# EAGLE board Veroboard for L293D (EAGLE 7.7.0)
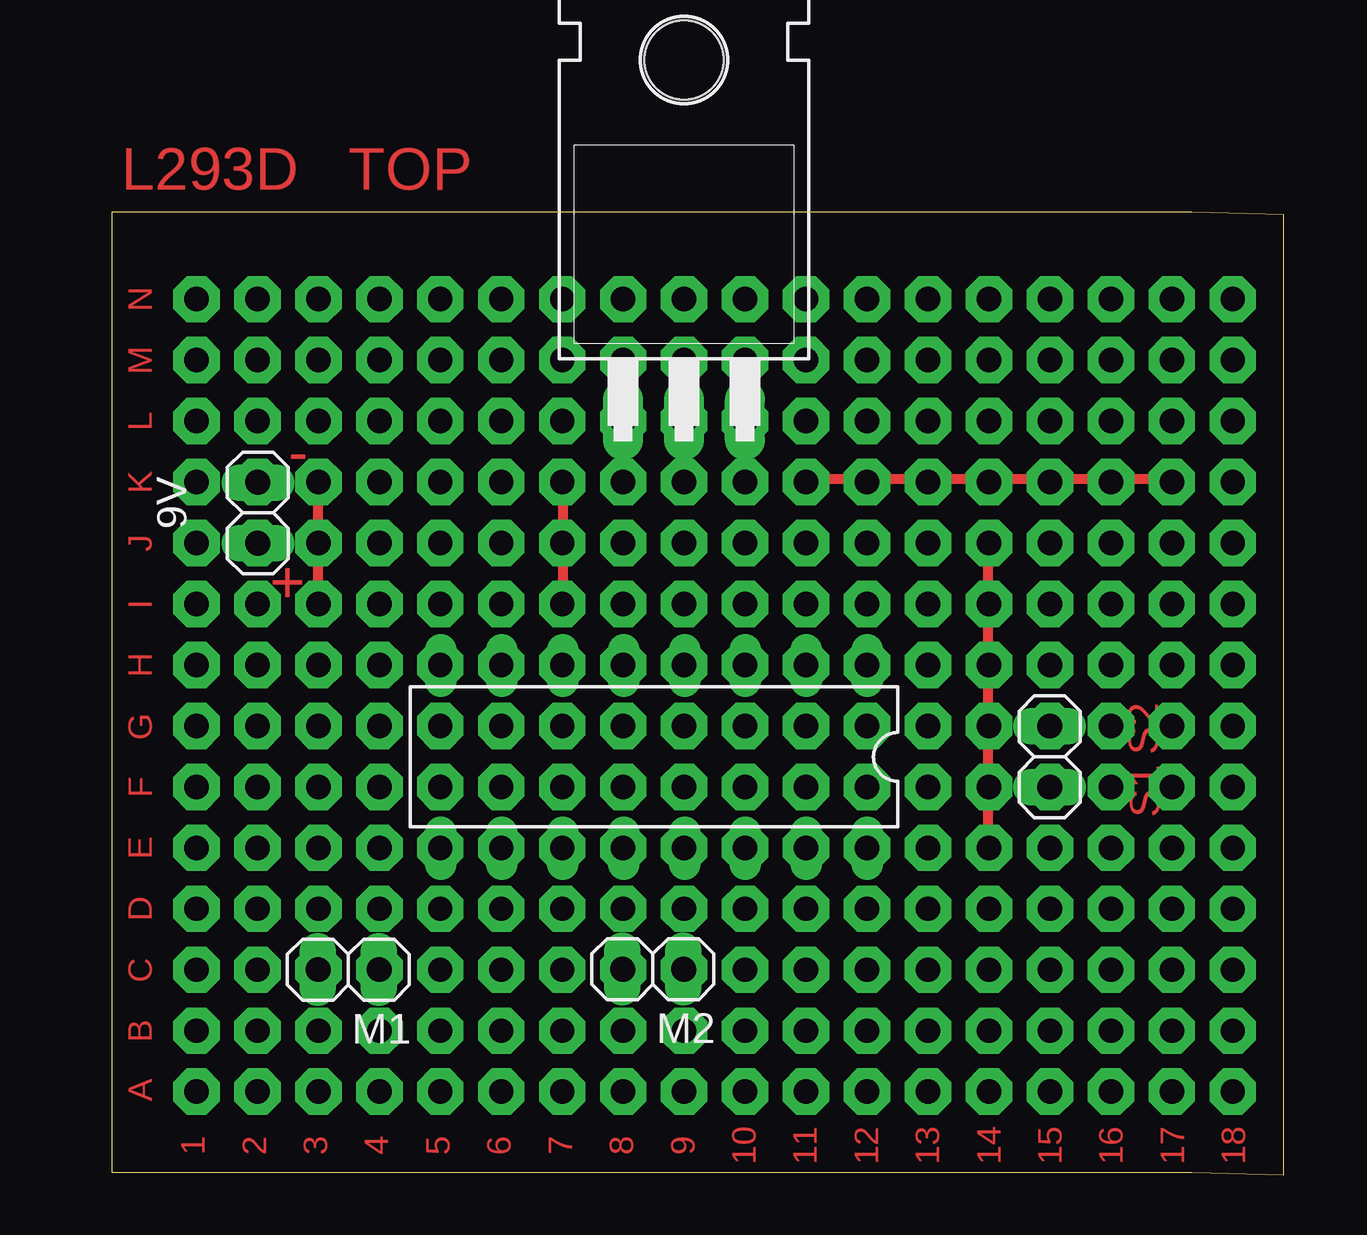
[diagram p0: board, top side]
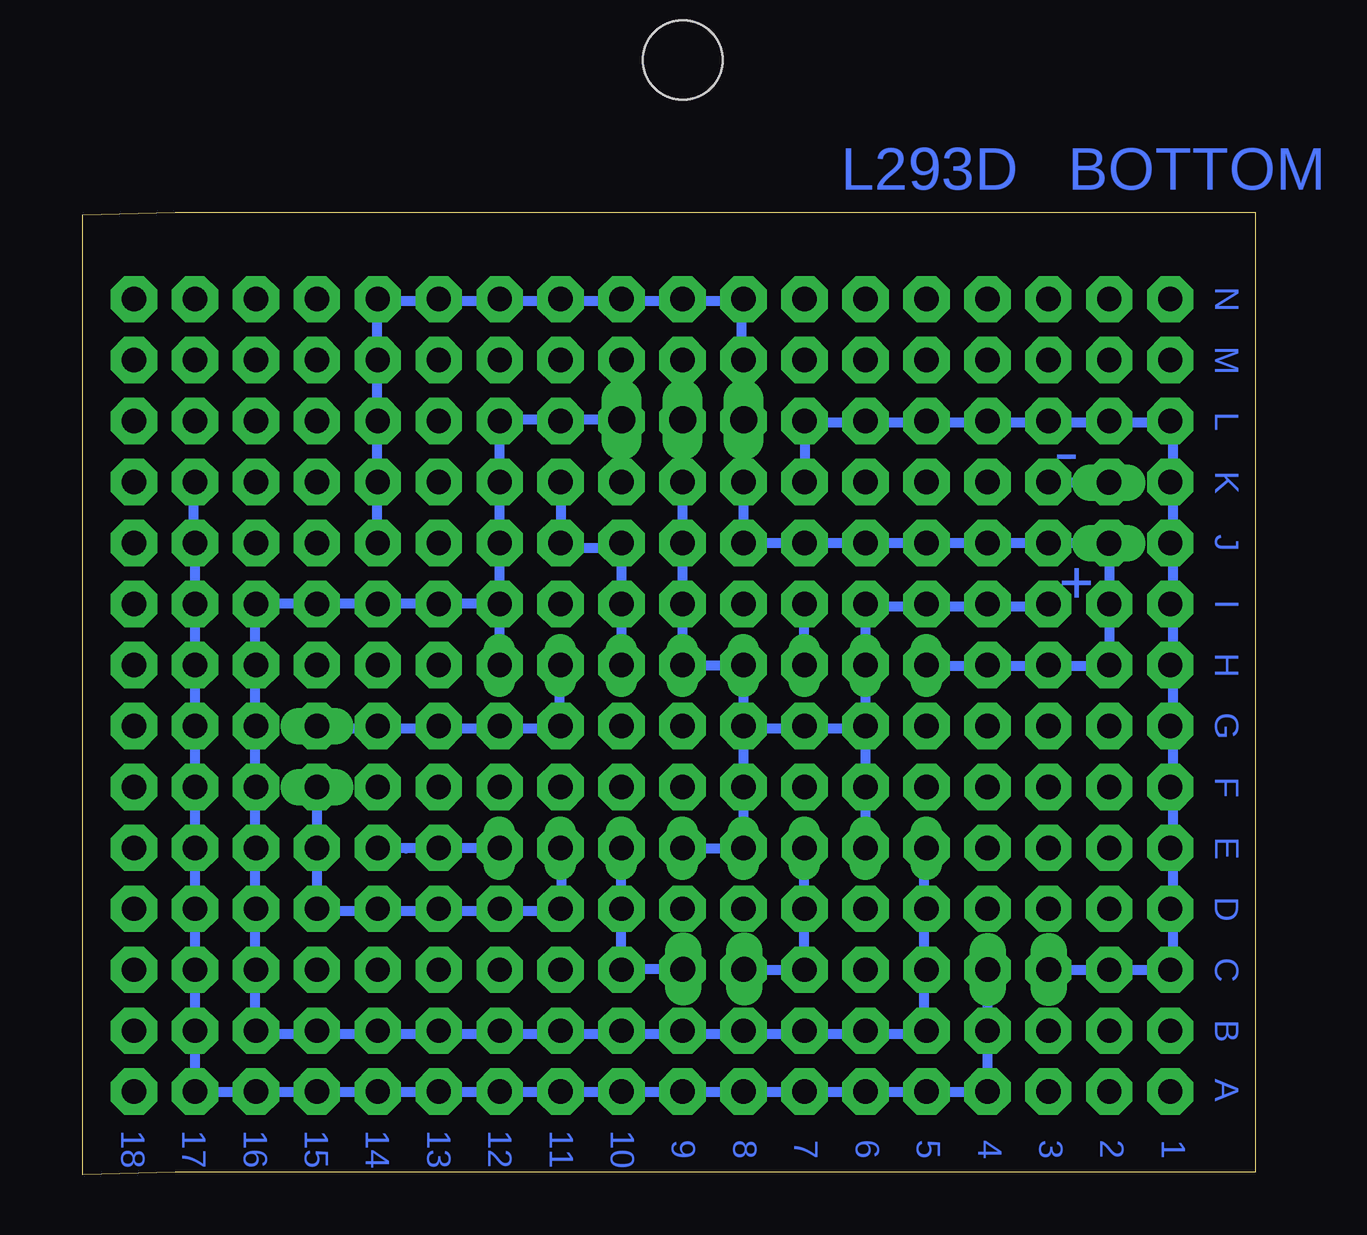
[diagram p1: board, bottom side, seen from below]

Size 48.84 x 40.11 mm. Coordinates in mm from the lower left corner, seen from the top.
Outline: 45,0.11 48.84,0 48.84,40 45,40.11 0,40.11 0,0.11 45,0.11
Copper layers (1*16): Top 0.035mm / dielectric 1.5mm / Bottom 0.035mm
Design rules "default": minimum track width 10mil, minimum drill 24mil, track to track 8mil, track to pad 8mil, pad to pad 8mil, via to via 8mil, smd to smd 8mil, copper to edge 40mil, drill to drill 8mil, minimum pad ring 10mil, minimum via ring 8mil, stop-mask expansion 4mil, vias tented up to drill 0mil, thermal gap 10mil

## Footprints (pad centres in the part's own frame; a part is rotated, then mirrored left to right if it is on the bottom)
1X14 = drill 1.016 pad 1.93 octagon: 1 -16.51,0; 2 -13.97,0; 3 -11.43,0; 4 -8.89,0; 5 -6.35,0; 6 -3.81,0; 7 -1.27,0; 8 1.27,0; 9 3.81,0; 10 6.35,0; 11 8.89,0; 12 11.43,0; 13 13.97,0; 14 16.51,0
1X02 = drill 1.016 long: 1 -1.27,0; 2 1.27,0
DIL16 = drill 0.813 long: 1 -8.89,-3.81; 2 -6.35,-3.81; 3 -3.81,-3.81; 4 -1.27,-3.81; 5 1.27,-3.81; 6 3.81,-3.81; 7 6.35,-3.81; 8 8.89,-3.81; 9 8.89,3.81; 10 6.35,3.81; 11 3.81,3.81; 12 1.27,3.81; 13 -1.27,3.81; 14 -3.81,3.81; 15 -6.35,3.81; 16 -8.89,3.81
TO220H = drill 1.118 long: 1 -2.54,-10.16; 2 0,-10.16; 3 2.54,-10.16 | hole 3.302: 0,4.826

## Placement (x,y rotation side)
1  [1X14]  3.54,19.97 90 top
2  [1X14]  6.08,19.97 90 top
4  [1X14]  11.16,19.97 90 top
9V  [1X02]  6.1,27.57 90 top
IC1  L293D  [DIL16]  22.6,17.41 180 top
IC2  7805T  [TO220H]  23.85,41.62 0 top
IR_SIG  [1X02]  39.09,17.42 270 top
JP3  [1X14]  8.62,19.97 90 top
JP5  [1X14]  13.7,19.97 90 top
JP6  [1X14]  16.24,19.97 90 top
JP7  [1X14]  18.78,19.97 90 top
JP8  [1X14]  21.32,19.97 90 top
JP9  [1X14]  23.86,19.97 90 top
JP10  [1X14]  26.4,19.97 90 top
JP11  [1X14]  28.94,19.97 90 top
JP12  [1X14]  31.48,19.97 90 top
JP13  [1X14]  34.02,19.97 90 top
JP14  [1X14]  36.56,19.97 90 top
JP15  [1X14]  39.1,19.97 90 top
JP16  [1X14]  41.64,19.97 90 top
JP17  [1X14]  44.18,19.97 90 top
JP18  [1X14]  46.72,19.97 90 top
M1  [1X02]  9.87,8.54 180 top
M2  [1X02]  22.56,8.57 180 top

## Library data of the parts
1 2 4 9V IR_SIG JP3 JP5-JP18 M1 M2 = pinhead_1x14_no_frame
IC1 = st-microelectronics; MPN: L293D; OC_FARNELL: 9589619; OC_NEWARK: 56P8249
IC2 = adafruit

## Nets
N$1: IC1.1 IC1.9 IC2.3
N$2: 9V.2 IC1.4 IC1.5 IC1.7 IC1.10 IC1.12 IC1.13 IC2.2
N$3: IC1.6 M1.2
N$4: IC1.14 M2.1
N$5: IC1.3 M1.1
N$6: IC1.11 M2.2
N$7: IC1.2 IR_SIG.1
N$8: IC1.15 IR_SIG.2
N$9: 9V.1 IC1.8 IC1.16 IC2.1

## Tracks (layer width: path | path; a pad name or v marks a point on that pad's centre or on a via)
N$1
  Bottom 0.406: IC2.3 31.54,31.46 31.54,31.49 31.49,31.49 31.49,23.8 | 31.49,23.8 IC1.1 | IC1.9 13.81,13.6 13.81,5.86 41.87,5.86 41.87,6 41.67,6 41.67,23.8 31.49,23.8
N$2  (via drill 0.6)
  Top 0.406: v8.6,28.86 v8.6,23.67
  Bottom 0.406: 9V.2 8.62,28.84 8.62,28.86 v8.6,28.86 | v8.6,23.67 16.24,23.67 16.24,23.7 16.25,23.7 IC1.7 | IC2.2 23.87,31.46 IC1.4 IC1.5 21.33,18.66 21.33,18.58 | 21.33,18.58 IC1.12 IC1.13 | IC1.7 IC1.10 | IC1.7 16.25,18.58 21.33,18.58
N$3  (via drill 0.6)
  Top 0.406: v18.82,23.67 v18.82,28.86
  Bottom 0.406: IC1.6 18.78,23.67 v18.82,23.67 | v18.82,28.86 18.75,28.86 18.75,31.35 3.38,31.35 3.38,31.49 3.43,31.49 3.43,8.54 | M1.2 3.43,8.54 | 3.43,8.54 3.43,8.47
N$4
  Bottom 0.406: M2.1 26.44,8.57 26.44,8.6 26.41,8.6 IC1.14
N$5  (via drill 0.6)
  Top 0.406: v44.22,28.98 v28.98,28.98
  Bottom 0.406: M1.1 11.17,8.54 11.17,3.44 44.21,3.44 44.21,3.54 44.16,3.54 44.16,26.42 44.22,26.42 v44.22,28.98 | v28.98,28.98 28.98,28.72 28.94,28.72 28.94,26.12 26.42,26.12 26.42,26.42 26.41,26.42 IC1.3
N$6
  Bottom 0.406: IC1.11 18.81,13.6 18.81,8.53 21.29,8.53 M2.2
N$7
  Bottom 0.406: IC1.2 28.99,21.22 28.99,18.58 39.09,18.58 IR_SIG.1
N$8
  Bottom 0.406: IC1.15 28.91,13.6 28.91,10.98 39.09,10.98 IR_SIG.2
N$9  (via drill 0.6)
  Top 0.406: v36.54,13.62 v36.54,26.42
  Bottom 0.406: IC1.8 13.71,21.18 6.07,21.18 6.07,26.3 9V.1 21.43,26.3 21.43,26.37 21.31,26.37 IC2.1 21.38,31.46 21.38,36.43 36.59,36.43 36.59,26.42 v36.54,26.42 | IC1.16 35.38,13.6 36.54,13.6 v36.54,13.62
S$1  (via drill 0.6)
  other vias: 36.54,21.29
S$2  (via drill 0.6)
  other vias: 11.22,26.27
S$3  (via drill 0.6)
  other vias: 18.88,26.39

## Text on the board
Top: L293D TOP | N | M | L | K | - | J | + | I | H | S2 | G | S1 | F | E | D | C | B | A | 1 / 2 / 3 / 4 / 5 / 6 / 7 / 8 / 9 / 10 / 11 / 12 / 13 / 14 / 15 / 16 / 17 / 18
Bottom: L293D BOTTOM | N | M | L | K | - | - | J | I | + | + | H | G | F | E | D | C | B | A | 1 / 2 / 3 / 4 / 5 / 6 / 7 / 8 / 9 / 10 / 11 / 12 / 13 / 14 / 15 / 16 / 17 / 18